# Altium PCB M_G_T.PcbDoc
Units mil, origin at the board's own origin, x right, y up, seen from the top; angles counter-clockwise.
Board outline 8160 x 7260 mil, 2 copper layers (Top Layer, Bottom Layer); 157 components, 273 nets, 1206 pads, 0 vias.
Unrouted connection lines stored in the file: 848.
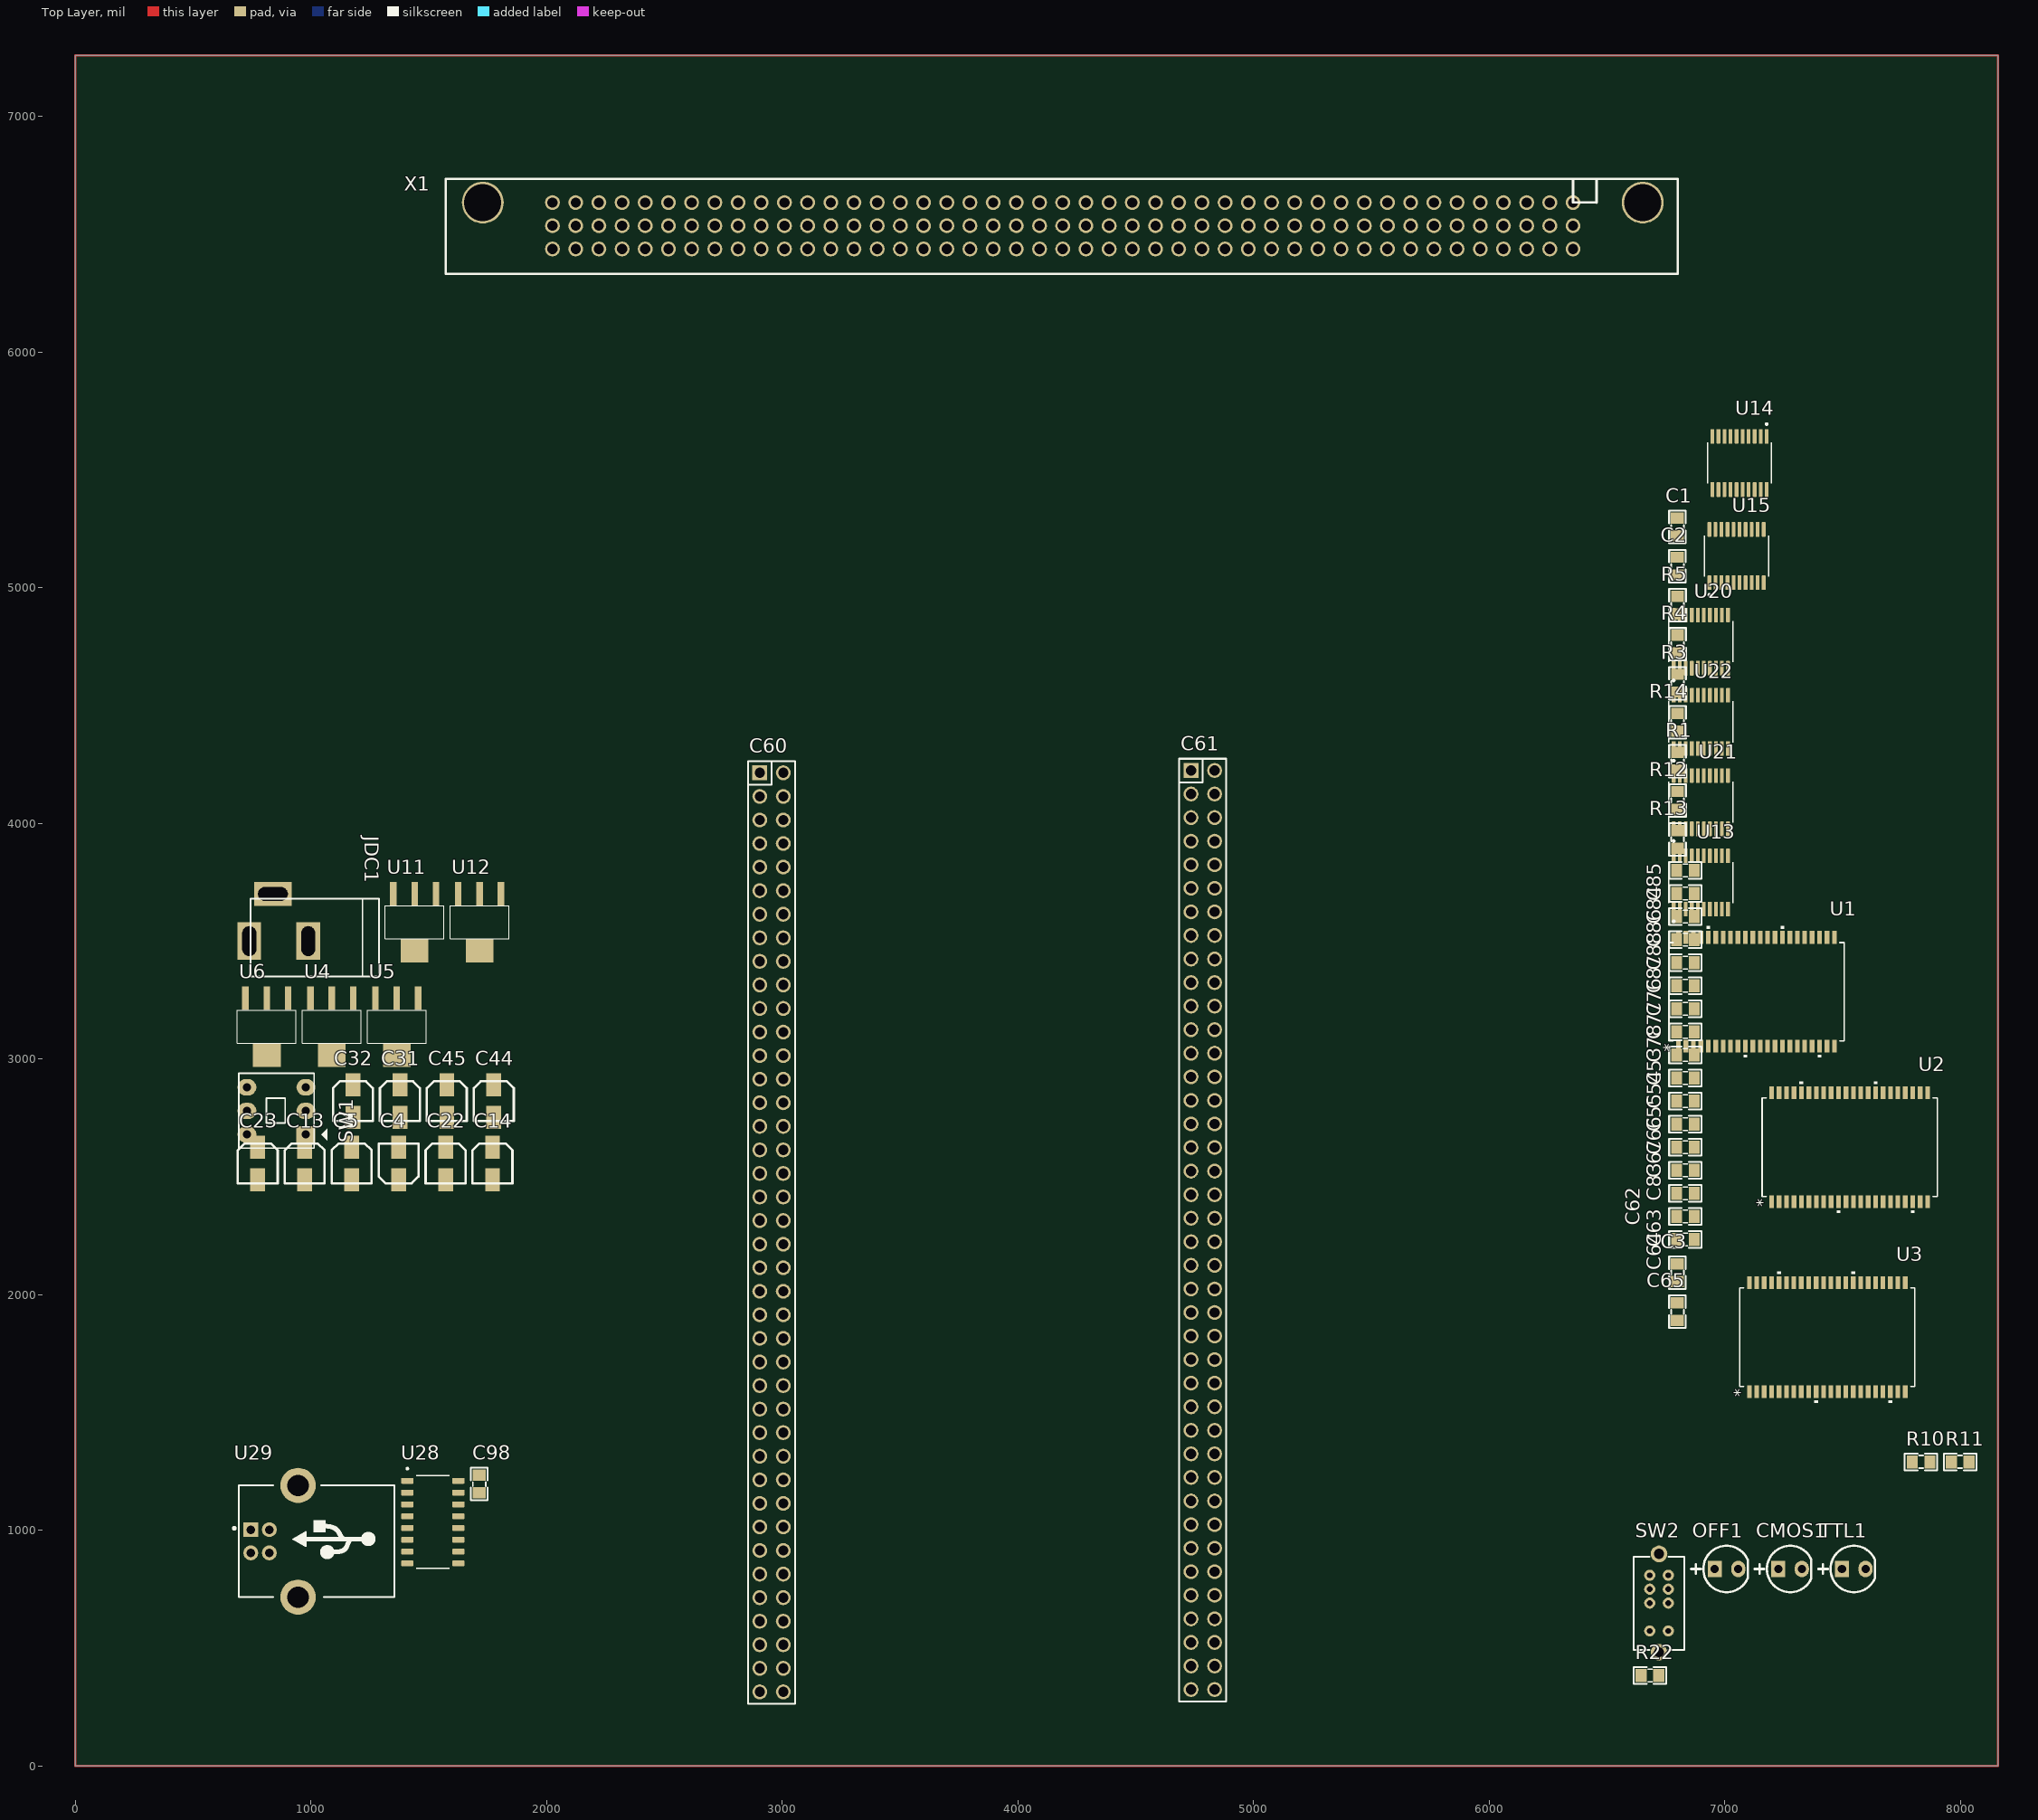
[diagram p0: Top Layer view]
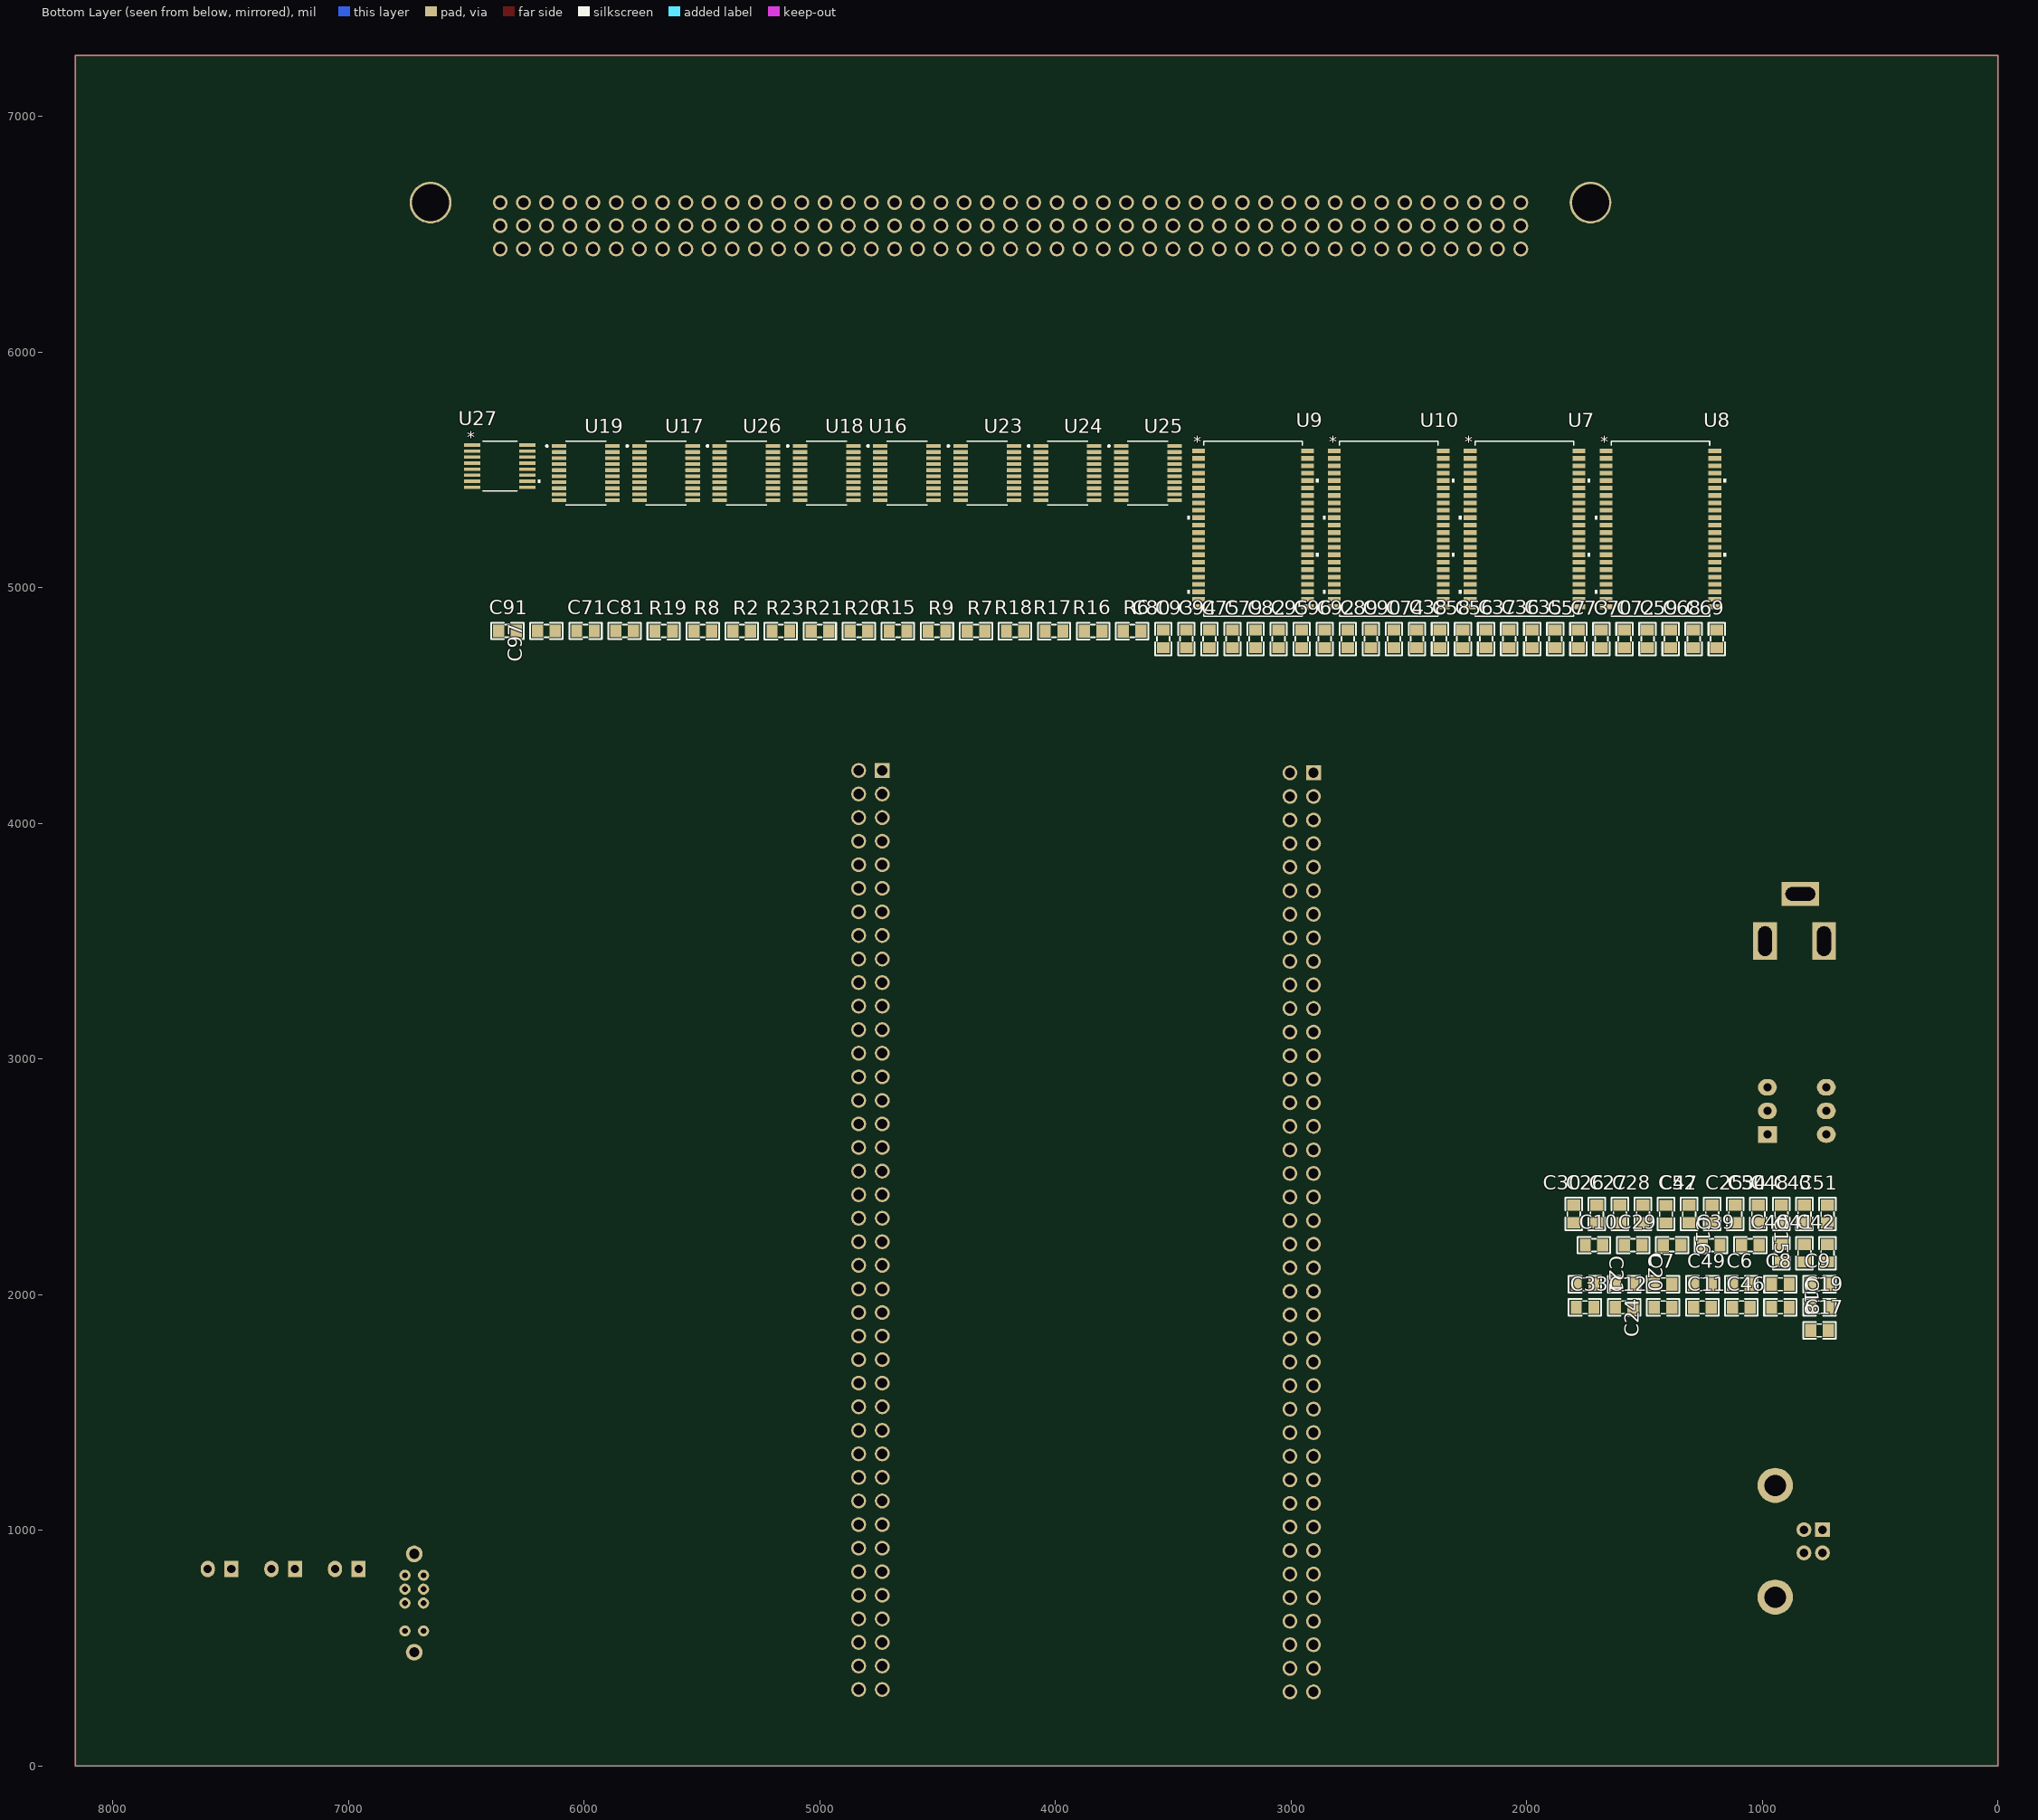
[diagram p1: Bottom Layer view, seen from below]

## Layer stack, top to bottom
Top Solder: solder mask 0.4, Solder Resist, Dk 3.5
Top Layer: signal copper 1.4
Dielectric 1: dielectric 12.6, FR-4, Dk 4.8
Bottom Layer: signal copper 1.4
Bottom Solder: solder mask 0.4, Solder Resist, Dk 3.5

## Board outline
0,0 8160,0 8160,7260 0,7260

## Design rules (kind name [scope] priority, off if disabled: settings)
Clearance [All] p1: gap=10 ignorepadtopadclearanceinfootprint=FALSE except(0: Arc-Hole Track-Hole SMDPad-Hole THPad-Hole Via-Hole Fill-Hole Poly-Hole Region-Hole Text-Hole)
PolygonConnect [All] p1: connectstyle=Relief reliefconductorwidth=10 reliefentries=4 polygonreliefangle="90 Angle" airgapwidth=10
RoomDefinition M_G_T [InComponentClass('M_G_T')] p1: confinementstyle=ConfineIn formatcopy=TRUE lockcomponents=FALSE outline -815,-4870 1185,-4870 1185,-3870 -815,-3870
RoutingVias [All] p1: holewidth=28 width=50 viastyle="Through Hole" minholewidth=28 minwidth=50 maxholewidth=28 maxwidth=50
SolderMaskExpansion [All] p1: expansion=4 istentingtop=FALSE
Width [All] p1: maxlimit=10 minlimit=10 preferedwidth=10
30 further rules are at their usual default settings.

## Classes and differential pairs
component class M_G_T: C1 C2 C3 C4 C5 C6 C7 C8 C9 C10 C11 C12 C13 C14 C15 C16 C17 C18 C19 C20 C21 C22 C23 C24 C25 C26 C27 C28 C29 C30 C31 C32 C33 C34 C35 C36 C37 C38 C39 C40 C41 C42 C43 C44 C45 C46 C47 C48 C49 C50 C51 C52 C53 C54 C55 C58 C62 C64 C66 C78 C79 C80 C81 C82 C83 C84 C85 C86 C87 C88 C89 C90 C91 C92 C93 C94 C95 C96 C97 C98 CMOS1 JDC1 OFF1 R1 R2 R3 R5 R8 R13 R20 R21 R22 R23 SW1 SW2 TTL1 U1 U2 U3 U4 U5 U6 U7 U8 U9 U10 U11 U12 U13 U14 U15 U16 U18 U20 U24 U25 U26 U27 U28 U29 X1

## Components (designator, comment, footprint, x,y, rotation, side; value= is the part's Value field where it differs from the comment)
C1 "104" "Tu 0805" 6799.11,5258.09 r90 top
C2 "104" "Tu 0805" 6799.11,5092.21 r90 top
C3 "104" "Tu 0805" 6799.11,2093.81 r90 top
C4 "10uF" "tu nhom 4 (b)" 1372.52,2557.55 r90 top
C5 "10uF" "tu nhom 4 (b)" 1173.23,2557.55 r270 top
C6 "104" "Tu 0805" 1089.68,2044.76 r0 bottom
C7 "104" "Tu 0805" 1421.43,2044.76 r0 bottom
C8 "104" "Tu 0805" 923.81,2044.76 r180 bottom
C9 "104" "Tu 0805" 757.94,2044.76 r180 bottom
C10 "104" "Tu 0805" 1715.05,2210.63 r180 bottom
C11 "104" "Tu 0805" 1255.56,1946.89 r180 bottom
C12 "104" "Tu 0805" 1587.31,1946.89 r180 bottom
C13 "10uF" "tu nhom 4 (b)" 973.94,2557.55 r270 top
C14 "10uF" "tu nhom 4 (b)" 1771.1,2557.55 r270 top
C15 "104" "Tu 0805" 1051.56,2210.63 r0 bottom
C16 "104" "Tu 0805" 1383.31,2210.63 r0 bottom
C17 "104" "Tu 0805" 757.94,1849.01 r180 bottom
C18 "104" "Tu 0805" 923.81,1946.89 r180 bottom
C19 "104" "Tu 0805" 757.94,1946.89 r180 bottom
C20 "104" "Tu 0805" 1587.31,2044.76 r180 bottom
C21 "104" "Tu 0805" 1753.18,2044.76 r180 bottom
C22 "10uF" "tu nhom 4 (b)" 1571.81,2557.55 r270 top
C23 "10uF" "tu nhom 4 (b)" 774.65,2557.55 r270 top
C24 "104" "Tu 0805" 1421.43,1946.89 r180 bottom
C25 "104" "Tu 0805" 1213.31,2342.51 r90 bottom
C26 "104" "Tu 0805" 1702.68,2342.51 r90 bottom
C27 "104" "Tu 0805" 1604.8,2342.51 r90 bottom
C28 "104" "Tu 0805" 1506.93,2342.51 r90 bottom
C29 "104" "Tu 0805" 1549.18,2210.63 r180 bottom
C30 "104" "Tu 0805" 1800.55,2342.51 r90 bottom
C31 "10uF" "tu nhom 4 (b)" 1377.94,2821.77 r270 top
C32 "10uF" "tu nhom 4 (b)" 1178.65,2821.77 r270 top
C33 "104" "Tu 0805" 1753.18,1946.89 r180 bottom
C34 "104" "Tu 0805" 1115.43,2342.51 r90 bottom
C35 "104" "Tu 0805" 1879.05,4783.06 r90 bottom
C36 "104" "Tu 0805" 1976.93,4783.06 r90 bottom
C37 "104" "Tu 0805" 2074.8,4783.06 r90 bottom
C38 "104" "Tu 0805" 2368.43,4783.06 r90 bottom
C39 "104" "Tu 0805" 1217.43,2210.63 r180 bottom
C40 "104" "Tu 0805" 919.68,2176.63 r90 bottom
C41 "104" "Tu 0805" 821.81,2176.63 r90 bottom
C42 "104" "Tu 0805" 723.94,2176.63 r90 bottom
C43 "104" "Tu 0805" 821.81,2342.51 r90 bottom
C44 "10uF" "tu nhom 4 (b)" 1776.52,2821.77 r270 top
C45 "10uF" "tu nhom 4 (b)" 1577.23,2821.77 r270 top
C46 "104" "Tu 0805" 1089.68,1946.89 r180 bottom
C47 "104" "Tu 0805" 1409.05,2342.51 r270 bottom
C48 "104" "Tu 0805" 919.68,2342.51 r90 bottom
C49 "104" "Tu 0805" 1255.56,2044.76 r180 bottom
C50 "104" "Tu 0805" 1017.56,2342.51 r90 bottom
C51 "104" "Tu 0805" 723.94,2342.51 r90 bottom
C52 "104" "Tu 0805" 1311.18,2342.51 r90 bottom
C53 "104" "Tu 0805" 6833.11,3017.66 r180 top
C54 "104" "Tu 0805" 6833.11,2919.79 r180 top
C55 "104" "Tu 0805" 6833.11,2821.91 r180 top
C56 "104" "Tu 0805" 2172.68,4783.06 r90 bottom
C57 "104" "Tu 0805" 1781.18,4783.06 r90 bottom
C58 "104" "Tu 0805" 2270.55,4783.06 r90 bottom
C59 "104" "Tu 0805" 1389.68,4783.06 r90 bottom
C60 "JP40x2" JP40-D2T 2955,2265 r270 top
C61 "JP40x2" JP40-D2T 4785,2275 r270 top
C62 "104" "Tu 0805" 6833.11,2430.42 r180 top
C63 "104" "Tu 0805" 6833.11,2332.54 r180 top
C64 "104" "Tu 0805" 6833.11,2234.67 r180 top
C65 "104" "Tu 0805" 6799.11,1927.94 r90 top
C66 "104" "Tu 0805" 6833.11,2724.04 r180 top
C67 "104" "Tu 0805" 6833.11,2626.17 r180 top
C68 "104" "Tu 0805" 1291.81,4783.06 r90 bottom
C69 "104" "Tu 0805" 1193.94,4783.06 r90 bottom
C70 "104" "Tu 0805" 1585.43,4783.06 r90 bottom
C71 "104" "Tu 0805" 5994.36,4817.06 r180 bottom
C72 "104" "Tu 0805" 1487.56,4783.06 r90 bottom
C73 "104" "Tu 0805" 1683.31,4783.06 r90 bottom
C74 "104" "Tu 0805" 2466.3,4783.06 r90 bottom
C75 "104" "Tu 0805" 3249.29,4783.06 r90 bottom
C76 "104" "Tu 0805" 6833.11,3311.28 r180 top
C77 "104" "Tu 0805" 6833.11,3213.41 r180 top
C78 "104" "Tu 0805" 6833.11,3115.54 r180 top
C79 "104" "Tu 0805" 3151.42,4783.06 r90 bottom
C80 "104" "Tu 0805" 3542.91,4783.06 r90 bottom
C81 "104" "Tu 0805" 5828.49,4817.06 r180 bottom
C82 "104" "Tu 0805" 3053.54,4783.06 r90 bottom
C83 "104" "Tu 0805" 6833.11,2528.29 r180 top
C84 "104" "Tu 0805" 6833.11,3702.78 r180 top
C85 "104" "Tu 0805" 6833.11,3800.65 r180 top
C86 "104" "Tu 0805" 6833.11,3604.91 r180 top
C87 "104" "Tu 0805" 6833.11,3409.16 r180 top
C88 "104" "Tu 0805" 6833.11,3507.03 r180 top
C89 "104" "Tu 0805" 2662.05,4783.06 r90 bottom
C90 "104" "Tu 0805" 2564.17,4783.06 r90 bottom
C91 "104" "Tu 0805" 6326.11,4817.06 r180 bottom
C92 "104" "Tu 0805" 2759.92,4783.06 r90 bottom
C93 "104" "Tu 0805" 3445.04,4783.06 r90 bottom
C94 "104" "Tu 0805" 3347.16,4783.06 r90 bottom
C95 "104" "Tu 0805" 2955.67,4783.06 r90 bottom
C96 "104" "Tu 0805" 2857.8,4783.06 r90 bottom
C97 "104" "Tu 0805" 6160.23,4817.06 r0 bottom
C98 "104" "Tu 0805" 1714.81,1197.06 r90 top
CMOS1 "LED 3mm Xanh" "LED 3MM XANH" 7277.33,836.51 r0 top
JDC1 "Jac DC" DC-IN 864,3601 r180 top
OFF1 "LED 3mm Do" "LED 3mm Do" 7007.33,836.51 r0 top
R1 "10k" "tro smd 0805" 6797.11,4263.76 r90 top
R2 "10k" "tro smd 0805" 5331.38,4819.06 r180 bottom
R3 "10k" "tro smd 0805" 6797.11,4595.1 r90 top
R4 "10k" "tro smd 0805" 6797.11,4760.77 r90 top
R5 "10k" "tro smd 0805" 6797.11,4926.44 r90 top
R6 "10k" "tro smd 0805" 3674.68,4819.06 r180 bottom
R7 "10k" "tro smd 0805" 4337.36,4819.06 r180 bottom
R8 "10k" "tro smd 0805" 5497.05,4819.06 r180 bottom
R9 "10k" "tro smd 0805" 4503.03,4819.06 r180 bottom
R10 "10k" "tro smd 0805" 7832.83,1293.46 r0 top
R11 "10k" "tro smd 0805" 7998.5,1293.46 r0 top
R12 "10k" "tro smd 0805" 6797.11,4098.09 r90 top
R13 "10k" "tro smd 0805" 6797.11,3932.42 r90 top
R14 "10k" "tro smd 0805" 6797.11,4429.43 r90 top
R15 "10k" "tro smd 0805" 4668.7,4819.06 r180 bottom
R16 "10k" "tro smd 0805" 3840.35,4819.06 r180 bottom
R17 "10k" "tro smd 0805" 4006.02,4819.06 r180 bottom
R18 "10k" "tro smd 0805" 4171.69,4819.06 r180 bottom
R19 "10k" "tro smd 0805" 5662.72,4819.06 r180 bottom
R20 "10k" "tro smd 0805" 4834.37,4819.06 r180 bottom
R21 "10k" "tro smd 0805" 5000.04,4819.06 r180 bottom
R22 "100R" "tro smd 0805" 6682.83,386.87 r0 top
R23 "10k" "tro smd 0805" 5165.71,4819.06 r180 bottom
SW1 "SW6S" SW6 979,2680.38 r180 top value=SW6
SW2 "SW-SSAC-1370753" SW-SSAC-1370753 6760.54,573.8 r90 top
TTL1 "LED 3mm Xanh" "LED 3MM XANH" 7547.33,836.51 r0 top
U1 "AS7C1026B-12TCN" TSOP-44_MIL400_ALL-M 7134.67,3285.77 r90 top
U2 "AS7C1026B-12TCN" TSOP-44_MIL400_ALL-M 7530,2626.3 r90 top
U3 "AS7C1026B-12TCN" TSOP-44_MIL400_ALL-M 7435,1820 r90 top
U4 "LM1117-5V" LM1117-SOP 1088.86,3207.88 r180 top
U5 "LM1117-3.3V" LM1117-SOP 1364.76,3207.88 r180 top
U6 "LM1117-2.5V" LM1117-SOP 812.95,3207.88 r180 top
U7 "AS7C1026B-12TCN" TSOP-44_MIL400_ALL-M 2009.46,5250.5 r180 bottom
U8 "AS7C1026B-12TCN" TSOP-44_MIL400_ALL-M 1433.15,5250.5 r180 bottom
U9 "AS7C1026B-12TCN" TSOP-44_MIL400_ALL-M 3162.07,5250.5 r180 bottom
U10 "AS7C1026B-12TCN" TSOP-44_MIL400_ALL-M 2585.77,5250.5 r180 bottom
U11 "LM1117-1.8V" LM1117-SOP 1440.45,3651 r180 top
U12 "LM1117-1.2V" LM1117-SOP 1716.36,3651 r180 top
U13 "TXS0108EPWR" SOP65P640X120-20N 6898.5,3749.73 r90 top
U14 "TXS0108EPWR" SOP65P640X120-20N 7062.8,5530 r270 top
U15 "TXS0108EPWR" SOP65P640X120-20N 7050,5135 r90 top
U16 "TXS0108EPWR" SOP65P640X120-20N 4630.32,5486.67 r180 bottom
U17 "TXS0108EPWR" SOP65P640X120-20N 5652.52,5486.67 r180 bottom
U18 "TXS0108EPWR" SOP65P640X120-20N 4971.05,5486.67 r180 bottom
U19 "TXS0108EPWR" SOP65P640X120-20N 5993.25,5486.67 r180 bottom
U20 "TXS0108EPWR" SOP65P640X120-20N 6898.5,4771.93 r90 top
U21 "TXS0108EPWR" SOP65P640X120-20N 6898.5,4090.46 r90 top
U22 "TXS0108EPWR" SOP65P640X120-20N 6898.5,4431.2 r90 top
U23 "TXS0108EPWR" SOP65P640X120-20N 4289.59,5486.67 r180 bottom
U24 "TXS0108EPWR" SOP65P640X120-20N 3948.86,5486.67 r180 bottom
U25 "TXS0108EPWR" SOP65P640X120-20N 3608.13,5486.67 r180 bottom
U26 "TXS0108EPWR" SOP65P640X120-20N 5311.79,5486.67 r180 bottom
U27 "CD4040BPWR" PW16-M 6357.74,5516.5 r180 bottom
U28 "CH340C" SOIC127P600X180-16N 1517.82,1035.55 r0 top
U29 "USB-B Through-Hole" USB2.5-2H4D 845.61,954.19 r90 top
X1 "СНП-135" X2N 1729.79,6635 r180 top

## Footprints (in the part's own frame and the unit in brackets; to place one, negate y for a bottom-side part, rotate by r counter-clockwise, add the part's x,y. Pads: shape width x height; smd on the part's side, far side on the other; paste and mask are expansions set on the pad)
DC-IN [mil] "Jac DC input"
  rect 100x160 hole 59.06 slot 125.98 at 90 deg: 1(125,100) 2(-125,100)
  rect 160x100 hole 59.06 slot 125.98 at 0 deg: 3(25,-100)
  silkscreen extent -425,-80 120,250, body extent -410,-105 134,269, height 434
JP40-D2T [mm] "80 pins, dual row, right angled, gold plating"
  rect 1.6x1.6 hole 1.1: 1(-49.53,-1.27)
  round 1.6 hole 1.1: 2(-46.99,-1.27) 3(-44.45,-1.27) 4(-41.91,-1.27) 5(-39.37,-1.27) 6(-36.83,-1.27) 7(-34.29,-1.27) 8(-31.75,-1.27) 9(-29.21,-1.27) 10(-26.67,-1.27) 11(-24.13,-1.27) 12(-21.59,-1.27) 13(-19.05,-1.27) 14(-16.51,-1.27) 15(-13.97,-1.27) 16(-11.43,-1.27) 17(-8.89,-1.27) 18(-6.35,-1.27) 19(-3.81,-1.27) 20(-1.27,-1.27) 21(1.27,-1.27) 22(3.81,-1.27) 23(6.35,-1.27) 24(8.89,-1.27) 25(11.43,-1.27) 26(13.97,-1.27) 27(16.51,-1.27) 28(19.05,-1.27) 29(21.59,-1.27) 30(24.13,-1.27) 31(26.67,-1.27) 32(29.21,-1.27) 33(31.75,-1.27) 34(34.29,-1.27) 35(36.83,-1.27) 36(39.37,-1.27) 37(41.91,-1.27) 38(44.45,-1.27) 39(46.99,-1.27) 40(49.53,-1.27) 41(49.53,1.27) 42(46.99,1.27) 43(44.45,1.27) 44(41.91,1.27) 45(39.37,1.27) 46(36.83,1.27) 47(34.29,1.27) 48(31.75,1.27) 49(29.21,1.27) 50(26.67,1.27) 51(24.13,1.27) 52(21.59,1.27) 53(19.05,1.27) 54(16.51,1.27) 55(13.97,1.27) 56(11.43,1.27) 57(8.89,1.27) 58(6.35,1.27) 59(3.81,1.27) 60(1.27,1.27) 61(-1.27,1.27) 62(-3.81,1.27) 63(-6.35,1.27) 64(-8.89,1.27) 65(-11.43,1.27) 66(-13.97,1.27) 67(-16.51,1.27) 68(-19.05,1.27) 69(-21.59,1.27) 70(-24.13,1.27) 71(-26.67,1.27) 72(-29.21,1.27) 73(-31.75,1.27) 74(-34.29,1.27) 75(-36.83,1.27) 76(-39.37,1.27) 77(-41.91,1.27) 78(-44.45,1.27) 79(-46.99,1.27) 80(-49.53,1.27)
  silkscreen extent -50.8,-2.54 50.8,2.54, body extent -50.8,-2.54 50.8,2.54, height 8.55
"LED 3mm Do" [mil] "Footprintf LED phi 3"
  rect 60x70 hole 35: 1(-50,0)
  oval 60x70 hole 35: 2(50,0)
  silkscreen extent -150,-98 90,98, body extent -77,-78 60,78, height 205
"LED 3MM XANH" [mil]
  rect 60x70 hole 35: 1(-50,0)
  oval 60x70 hole 35: 2(50,0)
  silkscreen extent -150,-98 90,98, body extent -77,-78 60,78, height 205
LM1117-SOP [mm]
  rect 0.7x2.54 smd: 1(-2.3,-1.27) 2(0,-1.27) 3(2.3,-1.27)
  rect 3x2.54 smd: 2(0,4.826)
  silkscreen extent -3.18,0 3.17,3.56, body extent -3.25,-1.78 3.25,5.18, height 1.68
PW16-M [mm]
  rect 1.762x0.355 smd paste+0 mask+0: 1(-2.971,2.275) 2(-2.971,1.625) 3(-2.971,0.975) 4(-2.971,0.325) 5(-2.971,-0.325) 6(-2.971,-0.975) 7(-2.971,-1.625) 8(-2.971,-2.275) 9(2.971,-2.275) 10(2.971,-1.625) 11(2.971,-0.975) 12(2.971,-0.325) 13(2.971,0.325) 14(2.971,0.975) 15(2.971,1.625) 16(2.971,2.275)
  silkscreen extent -1.85,-2.68 4.36,2.68, body extent -3.3,-2.55 3.3,2.55, height 1.2
SOIC127P600X180-16N [mm]
  rrect25% 1.31x0.62 smd: 1(-2.75,4.445) 2(-2.75,3.175) 3(-2.75,1.905) 4(-2.75,0.635) 5(-2.75,-0.635) 6(-2.75,-1.905) 7(-2.75,-3.175) 8(-2.75,-4.445) 9(2.75,-4.445) 10(2.75,-3.175) 11(2.75,-1.905) 12(2.75,-0.635) 13(2.75,0.635) 14(2.75,1.905) 15(2.75,3.175) 16(2.75,4.445)
  silkscreen extent -2.85,-5 1.78,5.85, body extent -3,-5 3,5, height 1.8
SOP65P640X120-20N [mm]
  rrect25% 1.57x0.41 smd: 1(-2.87,2.925) 2(-2.87,2.275) 3(-2.87,1.625) 4(-2.87,0.975) 5(-2.87,0.325) 6(-2.87,-0.325) 7(-2.87,-0.975) 8(-2.87,-1.625) 9(-2.87,-2.275) 10(-2.87,-2.925) 11(2.87,-2.925) 12(2.87,-2.275) 13(2.87,-1.625) 14(2.87,-0.975) 15(2.87,-0.325) 16(2.87,0.325) 17(2.87,0.975) 18(2.87,1.625) 19(2.87,2.275) 20(2.87,2.925)
  silkscreen extent -4.29,-3.45 2.2,3.45, body extent -3.09,-3.15 3.31,3.35, height 1.2
SW6 [mil] "SW DTDP - 6Pin 260x300x300 mil"
  rect 80x70 hole 35: 1(0,0)
  oval 80x70 hole 35: 2(0,-100) 3(0,-200) 4(250,-200) 5(250,-100) 6(250,0)
  silkscreen extent -90,-260 285,58, body extent -33,-259 281,55, height 532
SW-SSAC-1370753 [mm]
  round 1.2 hole 0.6: 1(0,2) 2(3,2) 3(4.5,2) 4(6,2) 5(0,0) 6(3,0) 7(4.5,0) 8(6,0)
  round 1.8 hole 1.1: 9(-2.3,1) 10(8.3,1)
  silkscreen extent -2.03,-1.72 8,3.72
"tro smd 0805" [mm]
  rect 1.2x1.4 smd: 1(-0.946,-0.061) 2(0.954,-0.061)
  silkscreen extent -1.75,-0.97 1.75,0.84, body extent -1.56,-0.76 1.44,0.64, height 0.53
TSOP-44_MIL400_ALL-M [mm]
  rect 1.375x0.507 smd paste+0 mask+0: 1(-5.869,8.4) 2(-5.869,7.6) 3(-5.869,6.8) 4(-5.869,6) 5(-5.869,5.2) 6(-5.869,4.4) 7(-5.869,3.6) 8(-5.869,2.8) 9(-5.869,2) 10(-5.869,1.2) 11(-5.869,0.4) 12(-5.869,-0.4) 13(-5.869,-1.2) 14(-5.869,-2) 15(-5.869,-2.8) 16(-5.869,-3.6) 17(-5.869,-4.4) 18(-5.869,-5.2) 19(-5.869,-6) 20(-5.869,-6.8) 21(-5.869,-7.6) 22(-5.869,-8.4) 23(5.869,-8.4) 24(5.869,-7.6) 25(5.869,-6.8) 26(5.869,-6) 27(5.869,-5.2) 28(5.869,-4.4) 29(5.869,-3.6) 30(5.869,-2.8) 31(5.869,-2) 32(5.869,-1.2) 33(5.869,-0.4) 34(5.869,0.4) 35(5.869,1.2) 36(5.869,2) 37(5.869,2.8) 38(5.869,3.6) 39(5.869,4.4) 40(5.869,5.2) 41(5.869,6) 42(5.869,6.8) 43(5.869,7.6) 44(5.869,8.4)
  silkscreen extent -7.07,-9.44 7.07,9.44, body extent -6.01,-9.31 6.01,9.31, height 1.2
"Tu 0805" [mm] "Compoment SMD 80x50mil"
  rect 1.2x1.4 smd: 1(-0.946,-0.003) 2(0.954,-0.003)
  silkscreen extent -1.75,-0.89 1.75,0.89, body extent -1.01,-0.64 1.01,0.63, height 0.61
"tu nhom 4 (b)" [mm]
  rect 2.5x1.6 smd: 1(-1.75,0) 2(1.75,0)
  silkscreen extent -2.15,-2.15 2.15,2.15, body extent -2.31,-2.15 2.29,2.15, height 3.91
USB2.5-2H4D [mm] "Connector; USB1.1, Type B, Thru-Hole; 4 Position; Right Angle"
  rect 1.6x1.6 hole 0.92: 1(1.25,2.546)
  round 1.6 hole 0.92: 2(-1.25,2.546) 3(-1.25,0.546) 4(1.25,0.546)
  round 3.8 hole 2.3: 5(6.02,-2.545) 6(-6.02,-2.545)
  silkscreen extent -6.02,-12.93 6.02,4.46, body extent -7.43,-13.06 7.43,3.24, height 10.58
X2N [mm]
  round 1.6 hole 1.1: 1(-7.51,0) 2(-10.01,0) 3(-12.51,0) 4(-15.01,0) 5(-17.51,0) 6(-20.01,0) 7(-22.51,0) 8(-25.01,0) 9(-27.51,0) 10(-30.01,0) 11(-32.51,0) 12(-35.01,0) 13(-37.51,0) 14(-40.01,0) 15(-42.51,0) 16(-45.01,0) 17(-47.51,0) 18(-50.01,0) 19(-52.51,0) 20(-55.01,0) 21(-57.51,0) 22(-60.01,0) 23(-62.51,0) 24(-65.01,0) 25(-67.51,0) 26(-70.01,0) 27(-72.51,0) 28(-75.01,0) 29(-77.51,0) 30(-80.01,0) 31(-82.51,0) 32(-85.01,0) 33(-87.51,0) 34(-90.01,-0.025) 35(-92.51,0) 36(-95.01,0) 37(-97.51,0) 38(-100.01,0) 39(-102.51,0) 40(-105.01,0) 41(-107.51,0) 42(-110.01,0) 43(-112.51,0) 44(-115.01,0) 45(-117.51,0) 46(-7.51,2.5) 47(-10.01,2.5) 48(-12.51,2.5) 49(-15.01,2.5) 50(-17.51,2.5) 51(-20.01,2.5) 52(-22.51,2.5) 53(-25.01,2.5) 54(-27.51,2.5) 55(-30.01,2.5) 56(-32.51,2.5) 57(-35.01,2.5) 58(-37.51,2.5) 59(-40.01,2.5) 60(-42.51,2.5) 61(-45.01,2.5) 62(-47.51,2.5) 63(-50.01,2.5) 64(-52.51,2.5) 65(-55.01,2.5) 66(-57.51,2.5) 67(-60.01,2.5) 68(-62.51,2.5) 69(-65.01,2.5) 70(-67.51,2.5) 71(-70.01,2.5) 72(-72.51,2.5) 73(-75.01,2.5) 74(-77.51,2.5) 75(-80.01,2.5) 76(-82.51,2.5) 77(-85.01,2.5) 78(-87.51,2.5) 79(-90.01,2.5) 80(-92.51,2.5) 81(-95.01,2.5) 82(-97.51,2.5) 83(-100.01,2.5) 84(-102.51,2.5) 85(-105.01,2.5) 86(-107.51,2.5) 87(-110.01,2.5) 88(-112.51,2.5) 89(-115.01,2.5) 90(-117.51,2.5) 91(-7.51,5) 92(-10.01,5) 93(-12.51,5) 94(-15.01,5) 95(-17.51,5) 96(-20.01,5) 97(-22.51,5) 98(-25.01,5) 99(-27.51,5) 100(-30.01,5) 101(-32.51,5) 102(-35.01,5) 103(-37.51,5) 104(-40.01,5) 105(-42.51,5) 106(-45.01,5) 107(-47.51,5) 108(-50.01,5) 109(-52.51,5) 110(-55.01,5) 111(-57.51,5) 112(-60.01,5) 113(-62.51,5) 114(-65.01,5) 115(-67.51,5) 116(-70.01,5) 117(-72.51,5) 118(-75.01,5) 119(-77.51,5) 120(-80.01,5) 121(-82.51,5) 122(-85.01,5) 123(-87.51,5) 124(-90.01,5) 125(-92.51,5) 126(-95.01,5) 127(-97.51,5) 128(-100.01,5) 129(-102.51,5) 130(-105.01,5) 131(-107.51,5) 132(-110.01,5) 133(-112.51,5) 134(-115.01,5) 135(-117.51,5)
  round 4.5 hole 4: ""(-125.02,0) ""(0,0)
  silkscreen extent -128.81,-2.57 4.01,7.69, body extent -128.73,-16.59 4.27,5.33, height 3.32

## Part data
C1 C2 C3 C6 C7 C8 C9 C10 C11 C12 C15 C16 C17 C18 C19 C20 C21 C24 C25 C26 C27 C28 C29 C30 C33 C34 C35 C36 C37 C38 C39 C40 C41 C42 C43 C46 C47 C48 C49 C50 C51 C52 C53 C54 C55 C56 C57 C58 C59 C62 C63 C64 C65 C66 C67 C68 C69 C70 C71 C72 C73 C74 C75 C76 C77 C78 C79 C80 C81 C82 C83 C84 C85 C86 C87 C88 C89 C90 C91 C92 C93 C94 C95 C96 C97 C98: library part "Tu 104", "Dán", Chung_Loai=Dán, Don_Vi=Con, Ma_Hang=MH004551, Ten_Linh_Kien="Tụ 0805 104-100nF 10% 50V"
C4 C5 C13 C14 C22 C23 C31 C32 C44 C45: library part "Tu Nhom 10uF 16V", "Dán", Chung_Loai=Dán, Don_Vi=Con, Ma_Hang=MH001458, So_Chan=2, Ten_Linh_Kien="Tụ Nhôm 10uF 16V 4x5MM"
C60 C61: "WR-PHD 2.54 mm Dual Socket Header", Manufacturer="W¨¹rth Elektronik eiSos GmbH", partNo=61307221821, ComponentLink1 Description=Manufacturer, ComponentLink1URL=http://www.we-online.com, ComponentLink2 Description=Datasheet, ComponentLink2URL=http://katalog.we-online.de/em/datasheet/6130xx21821.pdf, Created by="Karrer Zheng", Created Date="29 March 2013", NoPins=72
CMOS1 OFF1 TTL1: "Cắm", Chung_Loai=Cắm, Don_Vi=Con
  CMOS1 TTL1: Ma_Hang=MH004935, Ten_Linh_Kien="LED 3MM Xanh Lá ( SS)"
  OFF1: Ma_Hang=MH004931, Ten_Linh_Kien="LED 3MM Sáng Đỏ ( SS)"
JDC1: library part DCIN, "Jac DC input"
R1 R2 R3 R4 R5 R6 R7 R8 R9 R10 R11 R12 R13 R14 R15 R16 R17 R18 R19 R20 R21 R23: library part "Tro 0805 5% 10k", "Dán", Chung_Loai=Dán, Don_Vi=Con, Ma_Hang=MH005239, So_Chan=2, Ten_Linh_Kien="Trở 0805 5% 10k"
R22: library part "Tro 0805 5% 100R", "Dán", Chung_Loai=Dán, Don_Vi=Con, Ma_Hang=MH005251, So_Chan=2, Ten_Linh_Kien="Trở 0805 5% 100R"
SW1: "SW-DTDP - 6 Pin"
U1 U2 U3 U7 U8 U9 U10: "RAM 16data, 16address", Mfr_Name="Alliance Memory", Copyright="Copyright (C) 2023 Ultra Librarian. All rights reserved.", Manufacturer_Part_Number=AS7C1026B-12TCN, RefDes=RefDes, Type=DEV
U4 U5 U6 U11 U12: library part LM1117, "800mA Low-Dropout Linear Regulator", Creator="Nguyen Ba Bien", Website=http://group3i.net
U13 U14 U15 U16 U17 U18 U19 U20 U21 U22 U23 U24 U25 U26: "Chuyển đổi điệp áp 3.3V-5V", Package=None, Availability=Unavailable, MP=TXS0108EPWR, Price=None
U27: "Bộ đếm 12bit nhị phân", Mfr_Name="Texas Instruments", Copyright="Copyright (C) 2023 Ultra Librarian. All rights reserved.", Manufacturer_Part_Number=CD4040BPWR, RefDes=RefDes, Type=DEV
U28: "USB to TTL (thạch anh nội)", Package=None, Availability=Unavailable, MF="{'manufacturer': u'WCH'}", MP=CH340C, Price=None
U29: library part "USB-B TH"
X1: library part X2

## Nets (pads, with @x,y where several pads share a name; then routed paths per layer and width w, separated by ;. In a path a pad name is that pad's centre, name@x,y a point inside that pad or via, vN(x,y) a via of type N, cw(c..) or ccw(c..) an arc to the next point about the centre after c; other vN are vias at no path point)
1.2V: C45.1 C47.2 C48.2 C49.2 C50.2 C51.2 C52.2 C61.37 C61.44 U12.2
1.8V: C32.1 C34.2 C39.2 C40.2 C41.2 C42.2 C43.2 C61.38 C61.43 U11.2
2.5V: C23.1 C25.2 C26.2 C27.2 C28.2 C29.2 C30.2 C61.39 C61.42 U6.2
3.3V: C14.1 C16.2 C17.2 C18.2 C19.2 C20.2 C21.2 C53.1 C54.1 C55.1 C56.1 C57.1 C58.1 C59.1 C61.40 C61.41 C76.1 C77.1 C78.1 C79.1 C80.1 C81.1 C82.1 C98.1 R10.1 R11.1 R22.1 SW2.5 U5.2 U13.2 U14.2 U15.2 U16.2 U17.2 U18.2 U19.2 U20.2 U21.2 U22.2 U23.2 U24.2 U25.2 U26.2 U28.4 U28.16
5V: C1.2 C2.2 C3.2 C5.1 C7.2 C8.2 C9.2 C10.2 C11.2 C12.2 C35.2 C36.2 C37.2 C38.2 C97.2 SW2.8 U1.33 U2.33 U3.33 U4.2 U7.33 U8.33 U9.33 U10.33 U27.16 X1.49 X1.55 X1.63 X1.73 X1.81 X1.87
5V-IN: C4.1 C6.2 C13.1 C15.2 C22.1 C24.2 C31.1 C33.2 C44.1 C46.2 SW1.4 U4.3 U5.3 U6.3 U11.3 U12.3
A0: U1.5 U2.5 U3.5 U7.5 U8.5 U9.5 U10.5 U27.9
A1: U1.4 U2.4 U3.4 U7.4 U8.4 U9.4 U10.4 U27.7
A2: U1.3 U2.3 U3.3 U7.3 U8.3 U9.3 U10.3 U27.6
A3: U1.2 U2.2 U3.2 U7.2 U8.2 U9.2 U10.2 U27.5
A4: U1.1 U2.1 U3.1 U7.1 U8.1 U9.1 U10.1 U27.3
A5: U1.44 U2.44 U3.44 U7.44 U8.44 U9.44 U10.44 U27.2
A6: U1.43 U2.43 U3.43 U7.43 U8.43 U9.43 U10.43 U27.4
A7: U1.42 U2.42 U3.42 U7.42 U8.42 U9.42 U10.42 U27.13
A8: U1.27 U2.27 U3.27 U7.27 U8.27 U9.27 U10.27 U27.12
A9: U1.26 U2.26 U3.26 U7.26 U8.26 U9.26 U10.26 U27.14
A10: U1.25 U2.25 U3.25 U7.25 U8.25 U9.25 U10.25 U27.15
A11: U1.24 U2.24 U3.24 U7.24 U8.24 U9.24 U10.24 U27.1
A12: R19.2 U1.21 U2.21 U3.21 U7.21 U8.21 U9.21 U10.21
A13: R20.2 U1.20 U2.20 U3.20 U7.20 U8.20 U9.20 U10.20
A14: R21.2 U1.19 U2.19 U3.19 U7.19 U8.19 U9.19 U10.19
A15: R23.2 U1.18 U2.18 U3.18 U7.18 U8.18 U9.18 U10.18
CNT_CLK_3.3: C60.70 U26.5
CNT_CLK_5: U26.16 U27.10
CNT_RST_3.3: C60.71 U26.4
CNT_RST_5: U26.17 U27.11
D+: U28.5 U29.3
D-: U28.6 U29.2
GND: C1.1 C2.1 C3.1 C4.2 C5.2 C6.1 C7.1 C8.1 C9.1 C10.1 C11.1 C12.1 C13.2 C14.2 C15.1 C16.1 C17.1 C18.1 C19.1 C20.1 C21.1 C22.2 C23.2 C24.1 C25.1 C26.1 C27.1 C28.1 C29.1 C30.1 C31.2 C32.2 C33.1 C34.1 C35.1 C36.1 C37.1 C38.1 C39.1 C40.1 C41.1 C42.1 C43.1 C44.2 C45.2 C46.1 C47.1 C48.1 C49.1 C50.1 C51.1 C52.1 C53.2 C54.2 C55.2 C56.2 C57.2 C58.2 C59.2 C60.37 C60.38 C60.39 C60.40 C60.41 C60.42 C60.43 C60.44 C61.1 C61.2 C61.79 C61.80 C62.1 C63.1 C64.1 C65.1 C66.1 C67.1 C68.1 C69.1 C70.1 C71.1 C72.1 C73.1 C74.1 C75.1 C76.2 C77.2 C78.2 C79.2 C80.2 C81.2 C82.2 C83.1 C84.1 C85.1 C86.1 C87.1 C88.1 C89.1 C90.1 C91.1 C92.1 C93.1 C94.1 C95.1 C96.1 C97.1 C98.2 CMOS1.2 OFF1.2 R1.2 R2.2 R3.2 R4.2 R5.2 R6.2 R7.2 R8.2 R9.2 R12.2 R13.2 R14.2 R15.2 R16.2 R17.2 R18.2 R19.1 R20.1 R21.1 R23.1 SW1.1 SW2.7 TTL1.2 U1.34 U1.39 U1.40 U2.34 U2.39 U2.40 U3.34 U3.39 U3.40 U4.1 U5.1 U6.1 U7.34 U7.39 U7.40 U8.34 U8.39 U8.40 U9.34 U9.39 U9.40 U10.34 U10.39 U10.40 U11.1 U12.1 U13.11 U14.11 U15.11 U16.11 U17.11 U18.11 U19.11 U20.11 U21.11 U22.11 U23.11 U24.11 U25.11 U26.11 U27.8 U28.1 U29.4 X1.46 X1.58 X1.66 X1.70 X1.78 X1.90
In-/CE: C60.72 C60.73 C60.74 R10.2 U7.6 U7.17 U7.41 U8.6 U8.17 U8.41 U9.6 U9.17 U9.41 U10.6 U10.17 U10.41
In-OE: C60.69 C68.2 C70.2 C72.2 C74.2 C89.2 C91.2 C93.2 C95.2 R6.1 R7.1 R8.1 R9.1 R15.1 R16.1 R17.1 R18.1 U16.10 U17.10 U18.10 U19.10 U23.10 U24.10 U25.10 U26.10
IN-P1: U13.20 X1.31
IN-P2: U13.18 X1.32
IN-P3: U13.17 X1.33
IN-P4: U13.16 X1.34
IN-P5: U13.15 X1.35
IN-P6: U13.14 X1.36
IN-P7: U13.13 X1.37
IN-P8: U13.12 X1.38
IN-P9: U14.20 X1.39
IN-P10: U14.18 X1.40
IN-P11: U14.17 X1.41
IN-P12: U14.16 X1.42
IN-P13: U14.15 X1.43
IN-P14: U14.14 X1.48
IN-P15: U14.13 X1.51
IN-P16: U14.12 X1.53
IN-P17: U15.20 X1.56
IN-P18: U15.18 X1.57
IN-P19: U15.17 X1.77
IN-P20: U15.16 X1.79
IN-P21: U15.15 X1.83
IN-P22: U15.14 X1.84
IN-P23: U15.13 X1.99
IN-P24: U15.12 X1.100
IN-P25: U20.20 X1.101
IN-P26: U20.18 X1.102
IN-P27: U20.17 X1.103
IN-P28: U20.16 X1.104
IN-P29: U20.15 X1.107
IN-P30: U20.14 X1.108
IN-P31: U20.13 X1.109
IN-P32: U20.12 X1.111
IN-P33: U21.20 X1.112
IN-P34: U21.18 X1.117
IN-P35: U21.17 X1.118
IN-P36: U21.16 X1.119
IN-P37: U21.15 X1.120
IN-P38: U21.14 X1.121
IN-P39: U21.13 X1.122
IN-P40: U21.12 X1.123
IN-P41: U22.20 X1.124
IN-P42: U22.18 X1.125
IN-P43: U22.17 X1.126
IN-P44: U22.16 X1.127
IN-P45: U22.15 X1.128
IN-P46: U22.14 X1.129
IN-P47: U22.13 X1.130
NetCMOS1_1: CMOS1.1 SW2.1
NetJDC1_1: JDC1.1 SW1.6
NetJDC1_2: JDC1.2 JDC1.3 SW1.3
NetOFF1_1: OFF1.1 SW2.3
NetR1_1: R1.1 U3.38
NetR2_1: R2.1 U10.31 U10.32 U10.35 U10.36 U10.37 U10.38
NetR22_2: R22.2 SW2.2
NetSW2_4: SW2.4 TTL1.1
Out-/CE: C61.63 C61.64 C61.65 R11.2 U1.6 U1.17 U1.41 U2.6 U2.17 U2.41 U3.6 U3.17 U3.41
Out-OE: C61.62 C62.2 C64.2 C66.2 C83.2 C85.2 C87.2 R3.1 R4.1 R5.1 R12.1 R13.1 R14.1 U13.10 U14.10 U15.10 U20.10 U21.10 U22.10
OUT-P69: U16.20 X1.1
OUT-P70: U16.18 X1.2
OUT-P71: U16.17 X1.3
OUT-P72: U16.16 X1.4
OUT-P73: U16.15 X1.5
OUT-P74: U16.14 X1.6
OUT-P75: U16.13 X1.7
OUT-P76: U16.12 X1.8
OUT-P77: U17.20 X1.9
OUT-P78: U17.18 X1.10
OUT-P79: U17.17 X1.11
OUT-P80: U17.16 X1.12
OUT-P81: U17.15 X1.13
OUT-P82: U17.14 X1.14
OUT-P83: U17.13 X1.15
OUT-P84: U17.12 X1.16
OUT-P85: U18.20 X1.17
OUT-P86: U18.18 X1.18
OUT-P87: U18.17 X1.19
OUT-P88: U18.16 X1.20
OUT-P89: U18.15 X1.21
OUT-P90: U18.14 X1.22
OUT-P91: U18.13 X1.23
OUT-P92: U18.12 X1.24
OUT-P93: U19.20 X1.25
OUT-P94: U19.18 X1.26
OUT-P95: U19.17 X1.27
OUT-P96: U19.16 X1.28
OUT-P97: U19.15 X1.29
OUT-P98: U19.14 X1.30
OUT-P99: U19.13 X1.47
OUT-P100: U19.12 X1.50
OUT-P101: U23.20 X1.52
OUT-P102: U23.18 X1.54
OUT-P103: U23.17 X1.59
OUT-P104: U23.16 X1.60
OUT-P105: U23.15 X1.61
OUT-P106: U23.14 X1.62
OUT-P107: U23.13 X1.64
OUT-P108: U23.12 X1.65
OUT-P109: U24.20 X1.67
OUT-P110: U24.18 X1.68
OUT-P111: U24.17 X1.71
OUT-P112: U24.16 X1.72
OUT-P113: U24.15 X1.76
OUT-P114: U24.14 X1.82
OUT-P115: U24.13 X1.88
OUT-P116: U24.12 X1.89
OUT-P117: U25.20 X1.91
OUT-P118: U25.18 X1.92
OUT-P119: U25.17 X1.93
OUT-P120: U25.16 X1.94
OUT-P121: U25.15 X1.95
OUT-P122: U25.14 X1.96
OUT-P123: U25.13 X1.97
OUT-P124: U25.12 X1.98
OUT-P125: U26.20 X1.106
OUT-P126: U26.18 X1.135
P1: C61.3 U1.7 U13.1
P2: C61.4 U1.8 U13.3
P3: C61.5 U1.9 U13.4
P4: C61.6 U1.10 U13.5
P5: C61.7 U1.13 U13.6
P6: C61.8 U1.14 U13.7
P7: C61.9 U1.15 U13.8
P8: C61.10 U1.16 U13.9
P9: C61.11 U1.29 U14.1
P10: C61.12 U1.30 U14.3
P11: C61.13 U1.31 U14.4
P12: C61.14 U1.32 U14.5
P13: C61.15 U1.35 U14.6
P14: C61.16 U1.36 U14.7
P15: C61.17 U1.37 U14.8
P16: C61.18 U1.38 U14.9
P17: C61.19 U2.7 U15.1
P18: C61.20 U2.8 U15.3
P19: C61.21 U2.9 U15.4
P20: C61.22 U2.10 U15.5
P21: C61.23 U2.13 U15.6
P22: C61.24 U2.14 U15.7
P23: C61.25 U2.15 U15.8
P24: C61.26 U2.16 U15.9
P25: C61.27 U2.29 U20.1
P26: C61.28 U2.30 U20.3
P27: C61.29 U2.31 U20.4
P28: C61.30 U2.32 U20.5
P29: C61.31 U2.35 U20.6
P30: C61.32 U2.36 U20.7
P31: C61.33 U2.37 U20.8
P32: C61.34 U2.38 U20.9
P33: C61.35 U3.7 U21.1
P34: C61.36 U3.8 U21.3
P35: C61.45 U3.9 U21.4
P36: C61.46 U3.10 U21.5
P37: C61.47 U3.13 U21.6
P38: C61.48 U3.14 U21.7
P39: C61.49 U3.15 U21.8
P40: C61.50 U3.16 U21.9
P41: C61.51 U3.29 U22.1
P42: C61.52 U3.30 U22.3
P43: C61.53 U3.31 U22.4
P44: C61.54 U3.32 U22.5
P45: C61.55 U3.35 U22.6
P46: C61.56 U3.36 U22.7
P47: C61.57 U3.37 U22.8
P48: C61.58 U28.3
P49: C61.59 U28.2
P50: C61.60
P51: C61.61
P56: C61.66
P57: C61.67
P58: C61.68
P59: C61.69
P60: C61.70
P61: C61.71
P62: C61.72
P63: C61.73
P64: C61.74
P65: C61.75
P66: C61.76
P67: C61.77
P68: C61.78
P69: C60.3 U7.7 U16.1
P70: C60.4 U7.8 U16.3
P71: C60.5 U7.9 U16.4
P72: C60.6 U7.10 U16.5
P73: C60.7 U7.13 U16.6
P74: C60.8 U7.14 U16.7
P75: C60.9 U7.15 U16.8
P76: C60.10 U7.16 U16.9
P77: C60.11 U7.29 U17.1
P78: C60.12 U7.30 U17.3
P79: C60.13 U7.31 U17.4
P80: C60.14 U7.32 U17.5
P81: C60.15 U7.35 U17.6
P82: C60.16 U7.36 U17.7
P83: C60.17 U7.37 U17.8
P84: C60.18 U7.38 U17.9
P85: C60.19 U8.7 U18.1
P86: C60.20 U8.8 U18.3
P87: C60.21 U8.9 U18.4
P88: C60.22 U8.10 U18.5
P89: C60.23 U8.13 U18.6
P90: C60.24 U8.14 U18.7
P91: C60.25 U8.15 U18.8
P92: C60.26 U8.16 U18.9
P93: C60.27 U8.29 U19.1
P94: C60.28 U8.30 U19.3
P95: C60.29 U8.31 U19.4
P96: C60.30 U8.32 U19.5
P97: C60.31 U8.35 U19.6
P98: C60.32 U8.36 U19.7
P99: C60.33 U8.37 U19.8
P100: C60.34 U8.38 U19.9
P101: C60.35 U9.7 U23.1
P102: C60.36 U9.8 U23.3
P103: C60.45 U9.9 U23.4
P104: C60.46 U9.10 U23.5
P105: C60.47 U9.13 U23.6
P106: C60.48 U9.14 U23.7
P107: C60.49 U9.15 U23.8
P108: C60.50 U9.16 U23.9
P109: C60.51 U9.29 U24.1
P110: C60.52 U9.30 U24.3
P111: C60.53 U9.31 U24.4
P112: C60.54 U9.32 U24.5
P113: C60.55 U9.35 U24.6
P114: C60.56 U9.36 U24.7
P115: C60.57 U9.37 U24.8
P116: C60.58 U9.38 U24.9
P117: C60.59 U10.7 U25.1
P118: C60.60 U10.8 U25.3
P119: C60.61 U10.9 U25.4
P120: C60.62 U10.10 U25.5
P121: C60.63 U10.13 U25.6
P122: C60.64 U10.14 U25.7
P123: C60.65 U10.15 U25.8
P124: C60.66 U10.16 U25.9
P125: C60.67 U10.29 U26.1
P126: C60.68 U10.30 U26.3
P133: C60.75
P134: C60.76
P135: C60.77
P136: C60.78
VCCB: C63.2 C65.2 C67.2 C69.2 C71.2 C73.2 C75.2 C84.2 C86.2 C88.2 C90.2 C92.2 C94.2 C96.2 SW2.6 U13.19 U14.19 U15.19 U16.19 U17.19 U18.19 U19.19 U20.19 U21.19 U22.19 U23.19 U24.19 U25.19 U26.19
pads on no net: C60.1 C60.2 C60.79 C60.80 SW1.2 SW1.5 SW2.9 SW2.10 U1.11 U1.12 U1.22 U1.23 U1.28 U2.11 U2.12 U2.22 U2.23 U2.28 U3.11 U3.12 U3.22 U3.23 U3.28 U7.11 U7.12 U7.22 U7.23 U7.28 U8.11 U8.12 U8.22 U8.23 U8.28 U9.11 U9.12 U9.22 U9.23 U9.28 U10.11 U10.12 U10.22 U10.23 U10.28 U22.9 U22.12 U26.6 U26.7 U26.8 U26.9 U26.12 U26.13 U26.14 U26.15 U28.7 U28.8 U28.9 U28.10 U28.11 U28.12 U28.13 U28.14 U28.15 U29.1 U29.5 U29.6 X1. X1.44 X1.45 X1.69 X1.74 X1.75 X1.80 X1.85 X1.86 X1.105 X1.110 X1.113 X1.114 X1.115 X1.116 X1.131 X1.132 X1.133 X1.134
copper on no net: | length 30840
  Top Layer w10: 0,0 8160,0 8160,7260 0,7260 0,0

## Text inside footprints (layer, text, board x,y; h text height)
U1: Top Overlay "*" at 6788.99,3032.19 h50 r90; Mechanical 13 "*" at 6821.17,3084.27 h50 r90
U2: Top Overlay "*" at 7184.32,2372.72 h50 r90; Mechanical 13 "*" at 7216.5,2424.8 h50 r90
U3: Top Overlay "*" at 7089.32,1566.42 h50 r90; Mechanical 13 "*" at 7121.5,1618.5 h50 r90
U7: Mechanical 13 "*" at 2210.96,5564 h50; Bottom Overlay "*" at 2263.04,5596.18 h50
U8: Mechanical 13 "*" at 1634.65,5564 h50; Bottom Overlay "*" at 1686.73,5596.18 h50
U9: Mechanical 13 "*" at 3363.57,5564 h50; Bottom Overlay "*" at 3415.65,5596.18 h50
U10: Mechanical 13 "*" at 2787.27,5564 h50; Bottom Overlay "*" at 2839.34,5596.18 h50
U27: Mechanical 13 "*" at 6443.74,5564 h50; Bottom Overlay "*" at 6497.21,5615.04 h50